# EAGLE board frontPanel (EAGLE 6.1)
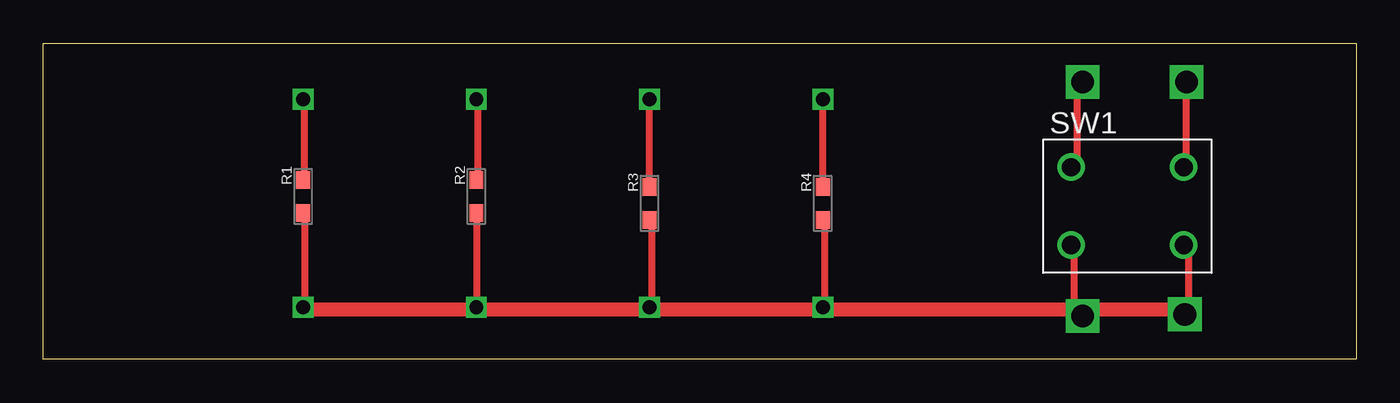
[diagram p0: board, top side]
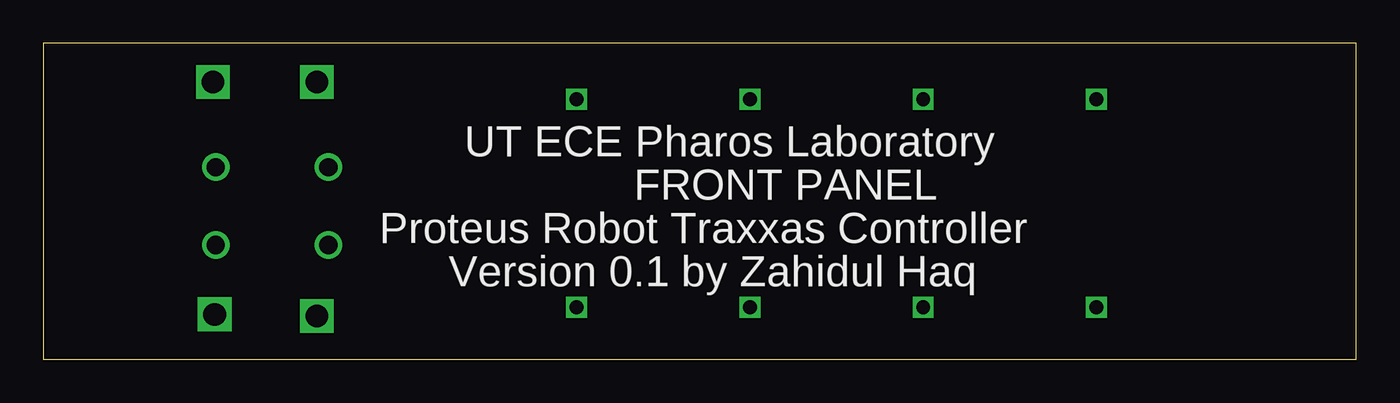
[diagram p1: board, bottom side, seen from below]

Size 75.79 x 18.24 mm. Coordinates in mm from the lower left corner, seen from the top.
Outline: 0,0 0,18.24 75.79,18.24 75.79,0 0,0
Copper layers (1*16): Top 0.035mm / dielectric 1.5mm / Bottom 0.035mm
Design rules: minimum track width 10mil, minimum drill 24mil, track to track 8mil, track to pad 8mil, pad to pad 8mil, via to via 8mil, smd to smd 8mil, copper to edge 40mil, drill to drill 8mil, minimum pad ring 10mil, minimum via ring 8mil, stop-mask expansion 4mil, vias tented up to drill 0mil, thermal gap 10mil

## Footprints (pad centres in the part's own frame; a part is rotated, then mirrored left to right if it is on the bottom)
SMDRESISTOR = smd 1 x 0.8: (+) -0.95,0; (-) 0.95,0
SWITCHMINI = drill 1.05: P$1 3.25,-2.25; P$2 -3.25,2.25; P$3 -3.25,-2.25; P$4 3.25,2.25

## Placement (x,y rotation side)
R1  [SMDRESISTOR]  15,9.4 270 top
R2  [SMDRESISTOR]  25,9.4 270 top
R3  [SMDRESISTOR]  35,9 270 top
R4  [SMDRESISTOR]  45,9 270 top
SW1  [SWITCHMINI]  62.58,8.84 0 top

## Library data of the parts
R1-R4 SW1 = ardupromini

## Tracks (layer width: path | path; a pad name or v marks a point on that pad's centre or on a via)
GND2
  Top 0.813: 14.9,2.9 66.5,2.9
S$1  (via drill 0.8)
  other vias: 15,15
S$2  (via drill 0.8)
  other vias: 15,3
S$3  (via drill 0.8)
  other vias: 25,15
S$4  (via drill 0.8)
  other vias: 25,3
S$5  (via drill 0.8)
  other vias: 35,15
S$6  (via drill 0.8)
  other vias: 35,3
S$7  (via drill 0.8)
  other vias: 45,15
S$8  (via drill 0.8)
  other vias: 45,3
S$9
  Top 0.406: 15,10.5 15.1,10.5 15.1,15 15.2,15
S$10
  Top 0.406: 15.2,8.4 15.1,8.4 15.1,2.9
S$11
  Top 0.406: 25,10.3 25.1,10.3 25.1,15 24.9,15 24.9,15.1
S$12
  Top 0.406: 25.1,8.5 25,8.5 25,3.1 25.1,3.1 25.1,3
S$13
  Top 0.406: 35,9.9 35,14.9 35.2,14.9 35.2,15
S$14
  Top 0.406: 35.1,8 35.1,2.9
S$15
  Top 0.406: 44.8,10 45,10 45,14.8
S$16
  Top 0.406: 45,8.1 45.1,8.1 45.1,2.9
S$17  (via drill 1.3)
  other vias: 60,16
S$18  (via drill 1.3)
  other vias: 66,16
S$19  (via drill 1.3)
  other vias: 60,2.5
S$20  (via drill 1.3)
  other vias: 65.9,2.6
S$21
  Top 0.406: 59.3,11.5 59.7,11.5 59.7,15.9
S$22
  Top 0.406: 66,11 66,16
S$23
  Top 0.406: 59.4,6.5 59.5,6.5 59.5,2.4
S$24
  Top 0.406: 65.8,6.6 66.1,6.6 66.1,2.2

## Text on the board
bPlace: FRONT PANEL
bNames: UT ECE Pharos Laboratory | Proteus Robot Traxxas Controller | Version 0.1 by Zahidul Haq